# Altium PCB PCB1.PcbDoc (part 2 of 2)
Units mil, origin at the board's own origin, x right, y up, seen from the top; angles counter-clockwise.
Board outline 1637.83 x 850.42 mil, 4 copper layers (Top Layer, Signal Layer 1, Signal Layer 2, Bottom Layer), stack 30.634 mil thick; 87 components, 65 nets, 368 pads, 401 vias.
Unrouted connection lines stored in the file: 1.
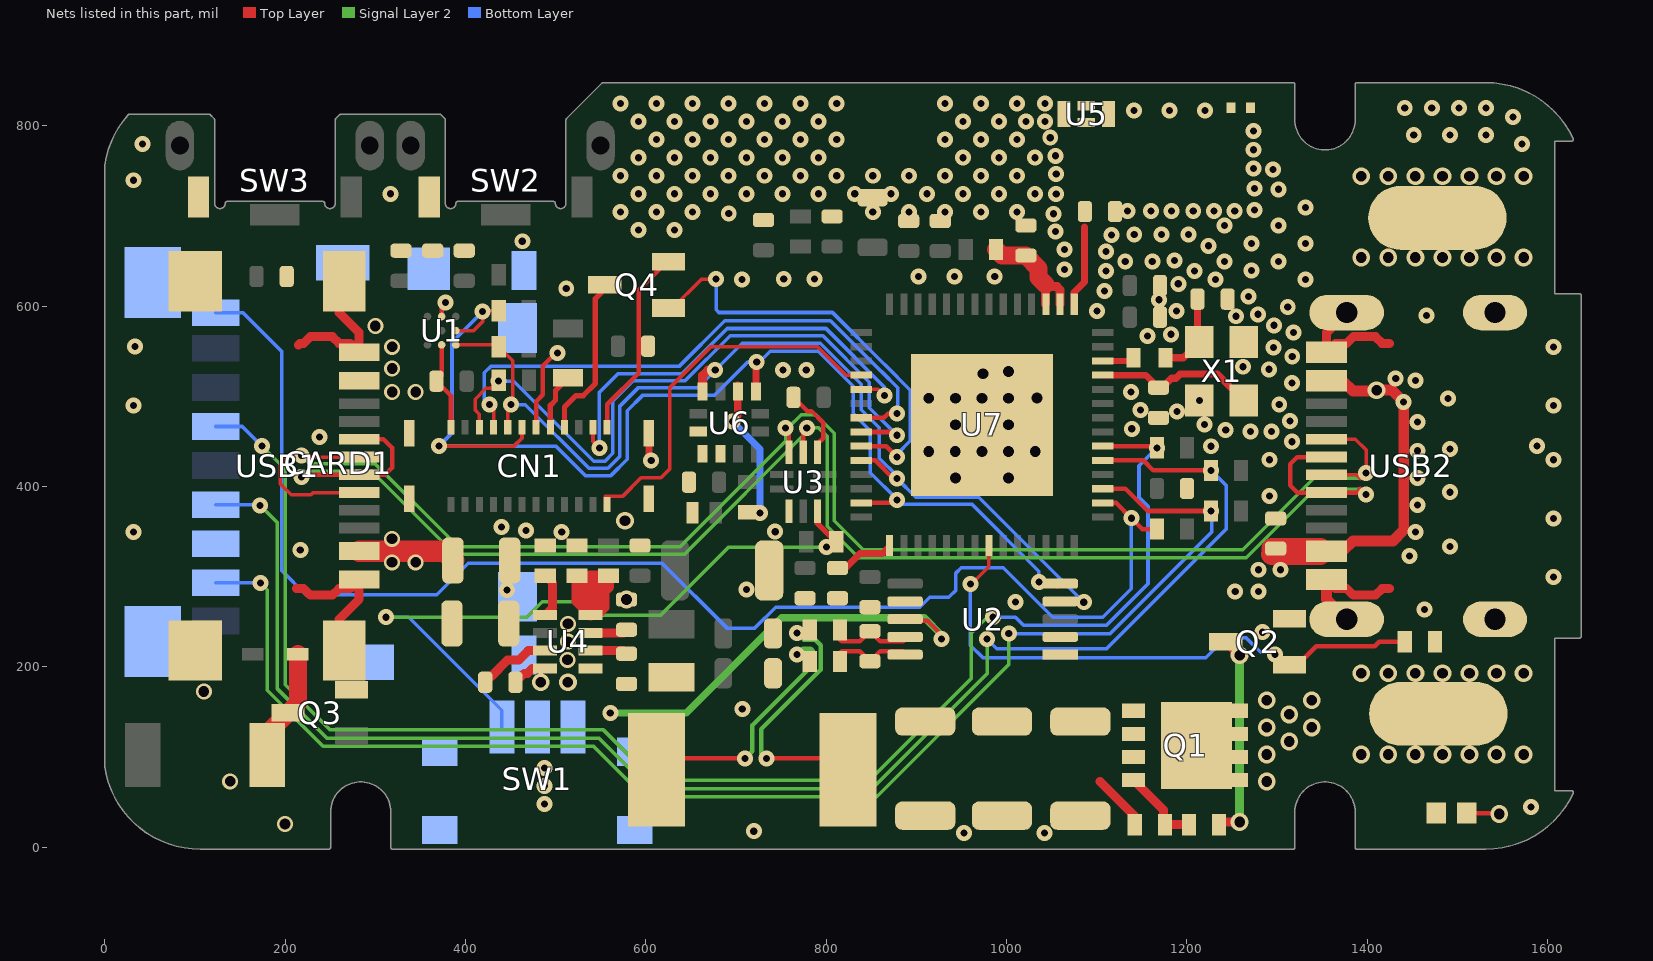
[diagram p4: the nets of this part, all layers, seen from the top]

## Via types
v1: diameter 17.72, hole 7.87, Top Layer to Bottom Layer, 324 vias
v2: diameter 19.68, hole 11.81, Top Layer to Bottom Layer, 43 vias
v3: diameter 17.72, hole 11.81, Top Layer to Bottom Layer, 16 vias
v4: diameter 22, hole 12, Top Layer to Bottom Layer, 15 vias
v5: diameter 19.68, hole 12.01, Top Layer to Bottom Layer, 2 vias
v6: diameter 17.72, hole 9.84, Top Layer to Bottom Layer, 1 vias

## Nets (pads, with @x,y where several pads share a name; then routed paths per layer and width w, separated by ;. In a path a pad name is that pad's centre, name@x,y a point inside that pad or via, vN(x,y) a via of type N, cw(c..) or ccw(c..) an arc to the next point about the centre after c; other vN are vias at no path point) (continued)
G13: CN1.12 U7.18 | length 428.2
  Top Layer w4: CN1.12@557.17,379.92 555,382.08 555,389 574.09,389 594.75,409.65 616.76,409.65 626.76,419.65 626.76,509.8 671.77,554.83 790.58,554.83 821.98,523.43 U7.18@838.74,523.43
G14: CN1.14 U7.19 | length 498
  Top Layer w3.94: CN1.14@541.42,465.74 541.42,450 v1(548.58,442.83)
  Top Layer w4: U7.19@838.74,507.68 857.73,507.68 v1(864.58,500.83)
  Bottom Layer w4: v1(548.58,442.83) 548.58,504.58 569.2,525.2 640.2,525.2 690.2,575.2 799.8,575.2 864.58,510.42 v1(864.58,500.83)
G15: CN1.21 U7.21 | length 648.6
  Top Layer w3.94: v1(426.58,490.83) 431.18,486.24 CN1.21@431.18,465.74
  Top Layer w5: U7.21@838.74,476.19 863.95,476.19 868.58,480.83 v1(878.58,480.83)
  Bottom Layer w3.94: v1(426.58,490.83) 421,496.41 421,526 428.17,533.17 636.9,533.17 687.73,584 804.78,584 861.78,527 862,527 879.41,509.59 879.41,481.65 v1(878.58,480.83)
G16: CN1.22 R18.2 U7.22 | length 742
  Top Layer w3.94: CN1.22@415.43,465.74 415.43,479.99 410.65,484.77 410.65,496.89 422.58,508.83 427.85,508.83 R18.2@436.85,517.83
  Top Layer w5: U7.22@838.74,460.44 874.97,460.44 v1(878.58,456.83)
  Bottom Layer w3.94: v1(436.58,516.83) 453.62,516.83 542.44,428 554.72,428 563.41,436.69 563.41,494.41 586.24,517.24 643.51,517.24 693.51,567.24 796.49,567.24 848,515.73 848,487.41 v1(878.58,456.83)
G17: Q4.1 U7.23 | length 473.9
  Top Layer w3.94: Q4.1@628.93,597.24 661.7,630 v1(678,630)
  Top Layer w5: U7.23@838.74,444.69 866.72,444.69 v1(878.58,432.83)
  Bottom Layer w3.94: v1(678,630) 678,596 681,593 807,593 865.06,534.94 865.29,534.94 893.41,506.81 893.41,450.69 878.58,435.86 v1(878.58,432.83)
G18: CN1.20 R19.2 U1.C3 U2.4 U6.4 U7.24 | length 1167.3
  Top Layer w3.94: R19.2@436.81,555.11 452.58,539.34 452.58,492.83 v1(450.58,490.83) 446.93,487.17 CN1.20@446.93,465.74
  Top Layer w4: U1.C3@389.33,557.08 434.84,557.08 R19.2@436.81,555.11
  Top Layer w5: U7.24@838.74,428.94 854.47,428.94 874.58,408.83 v1(878.58,408.83) ; U2.4@1059.65,272.51 1060.5,271.65 v1(1085.76,271.65)
  Top Layer w10: U6.4@663.05,505.28 663.05,523.05 669,529 v1(677,529)
  Bottom Layer w3.94: v1(450.58,490.83) 466.17,490.83 536.94,420.06 558.01,420.06 571.35,433.4 571.35,489.35 591.3,509.3 657.3,509.3 v1(677,529) 707,559 793.51,559 839,513.51 839,485.19 859,465.19 859,431.44 878.58,411.86 v1(878.58,408.83) 899.41,388 969.41,388 v1(1085.76,271.65)
G21: CN1.19 R20.2 U1.B3 U2.5 U6.1 U7.27 | length 1363.4
  Top Layer w3.94: v1(419,594) 419.99,594.99 R20.2@436.81,594.99
  Top Layer w4: v1(370.58,444.83) 453.83,444.83 462.68,453.68 CN1.19@462.68,465.74 ; U1.B3@389.33,572.82 408.82,572.82 419,583 v1(419,594)
  Top Layer w5: U7.27@838.74,381.7 875.46,381.7 v1(878.58,384.83) ; v1(1036,294) 1051.1,294 1056.27,288.83 U2.5@1059.65,292.2
  Top Layer w7.87: U6.1@722.11,505.28 v1@722.11,529.58
  Bottom Layer w3.94: v1(723,538) 723,535 738,550 791.28,550 830,511.28 830,481 849,462 849,415.44 878.58,385.85 v1(878.58,384.83) 883.35,380.06 961.94,380.06 1036,306 v1(1036,294)
  Bottom Layer w4: v1(419,594) 385,560 385,459.24 v1(370.58,444.83) 500.17,444.83 532.9,412.1 561.31,412.1 579.32,430.1 579.32,484.05 596.27,501 676,501 713,538 v1(723,538)
G39: CARD1.9 R17.1 U7.44 | length 1557
  Top Layer w5: U7.44@1106.45,381.7 1121.71,381.7 v1(1138.58,364.83) 1150.58,352.83 R17.1@1166.85,352.83
  Bottom Layer w3.94: CARD1.9@123.03,592.52 153.48,592.52 196,550 196,307 223,280 368,280 403,315 618,315 690,243 721,243 744,266 904,266 915,277 936,277 944,285 944,304 950,310 996.38,310 1051.38,255 1107,255 1138.58,286.58 v1(1138.58,364.83)
G40: CARD1.7 R15.2 U7.45 | length 1564.2
  Top Layer w5: U7.45@1106.45,397.45 1131.96,397.45 1156.58,372.83 v1(1226.85,372.83)
  Signal Layer 2 w3.94: v1(172.58,292.83) 180,285.41 180,174 242,112 542,112 598,56 856,56 1002.58,202.58 v1(1002.58,236.83)
  Bottom Layer w3.94: CARD1.7@123.03,293.31 172.1,293.31 v1(172.58,292.83) ; v1(1002.58,236.83) 1114.83,236.83 1227.94,349.94 1227.94,371.74 v1(1226.85,372.83)
G41: CARD1.5 R14.2 U7.47 | length 1709.9
  Top Layer w5: U7.47@1106.45,428.94 1151.84,428.94 1162.95,417.83 v1(1226.85,417.83)
  Signal Layer 2 w3.94: v1(172.24,378.94) 191,360.18 191,176 246,121 548,121 604.06,64.94 850.94,64.94 978.58,192.58 v1(978.58,230.83)
  Bottom Layer w3.94: CARD1.5@123.03,379.92 171.26,379.92 v1(172.24,378.94) ; v1@978.58,233.8 v1(978.58,230.83) 989.41,220 1111,220 1244,353 1244,400.68 v1(1226.85,417.83)
G42: CARD1.3 R13.2 U7.48 | length 1688.2
  Top Layer w5: U7.48@1106.45,444.69 1164.99,444.69 v1(1166.85,442.83)
  Signal Layer 2 w3.94: v1(174.21,444.88) 200,419.09 200,180 250,130 553,130 609,74 848,74 961,187 961,237.24 978.76,255 v1(985,255)
  Bottom Layer w3.94: CARD1.3@123.03,466.54 152.56,466.54 v1(174.21,444.88) ; v1(985,255) 1010,255 1019,246 1111,246 1157,292 1157,378 1147,388 1147,422.98 v1(1166.85,442.83)
G48: Q2.1 R22.2 U7.36 | length 639.5
  Top Layer w3.94: v1(960,292) 961.41,292 980.47,311.06 U7.36@980.47,334.46 ; v1(1297.76,213.65) 1309.17,202.24 Q2.1@1313.93,202.24
  Top Layer w5: Q2.1@1313.93,202.24 1322.99,202.24 1343.58,222.83 1408.58,222.83 1413.58,227.83 R22.2@1441.85,227.83
  Bottom Layer w3.94: v1(960,292) 960,224 974,210 1221,210 1243,232 1266,232 1282,216 1295.41,216 v1(1297.76,213.65)
GND: C1.1 C2.1 C3.1 C4.1 C5.2 C6.1 C7.2 C9.2 C11.2 C12.1 C13.1 C14.2 C15.1 C16.2 C17.1 C18.1 C19.1 C20.1 C21.2 C22.1 C23.2 C24.1 C25.1 C26.2 C27.1 C28.1 C29.1 C30.2 C31.1 C32.1 C33.1 C34.2 C35.2 C36.2 C38.1 C39.2 CARD1.6 CARD1.10 CARD1.11 CN1.13 CN1.18 CN1.24 CN1.25 CN1.26 CN1.27 CN1.28 D4.1 J2.1 Q2.2 Q3.2 Q4.2 R8.1 R9.1 R22.1 SW1.1 SW1.2 SW1.4 SW1.5 SW2.1 SW3.1 U1.C2 U2.1 U2.2 U2.7 U3.3 U3.8 U4.4 U5.4 U6.6 U6.7 U6.8 U7.57 U8.1 USB1.0 USB1.A1 USB1.A12 USB2.12 USB2.13 USB2.14 USB2.15 USB2.A1B12 USB2.B1A12 X1.2 X1.4 | length 1127.9
  Top Layer w5: U1.C2@373.58,557.08 373.58,522.56 C36.2@367.85,516.83 383.94,500.74 CN1.24@383.94,465.74 ; CN1.18@478.43,465.74 478.43,494.32 485.76,501.65 485.76,533.65 500.1,548 v1(502,548) ; CN1.13@557.17,465.74 557.17,491.06 592.41,526.31 592.41,618.31 622.52,648.42 Q4.2@628.93,648.42 ; C35.2@763.85,498.83 779.02,483.65 783.76,483.65 796.77,470.64 796.77,453.67 790.33,447.23 U3.3@790.33,438.08 ; U8.1@1510.41,37.82 1545.59,37.82 v2(1546.58,36.83)
  Top Layer w7.87: CN1.26@603.43,459.23 603.43,431.57 v1(606,429)
  Top Layer w10: 212.59,286.84 220.46,286.84 227.87,279.43 252.4,279.43 259.81,286.84 272.07,286.84 USB1.A12@282.07,296.85 282.07,274.99 259.83,252.75 ; 214.58,556.83 216.56,558.81 220.45,558.81 227.87,566.22 252.4,566.22 259.82,558.81 272.07,558.81 USB1.A1@282.07,548.81 282.07,570.67 259.83,592.91 ; C14.2@455.32,182.83 465.32,192.83 468.58,192.83 474.05,198.3 U4.4@488.38,198.3 ; USB2.A1B12@1355.1,296.85 1365.1,286.84 1377.36,286.84 1384.76,279.43 1409.3,279.43 1416.7,286.84 1424.57,286.84 ; USB2.13@1377.34,592.91 1355.1,570.67 USB2.B1A12@1355.1,548.82 1365.1,558.82 1377.36,558.82 1384.76,566.22 1409.3,566.22 1416.7,558.82 1424.57,558.82
  Top Layer w12: USB2.A1B12@1355.1,296.85 1355.1,274.99 USB2.12@1377.34,252.75
  other v1: 953.02,15.86 1041.98,15.86 719.76,17.65 1581.76,44.65 707,153 1284.18,238.36 1463.76,263.65 1010,272 446,285 711.76,285.65 1606.76,299.65 216.76,329.65 1491.76,333.65 31.76,349.65 506.76,349.65 743.55,349.84 467,351 440,355 1606.76,364.65 1291.76,389.65 1491.76,393.65 1291.76,429.65 1606.76,429.65 1491.76,441.65 1226.76,444.65 1588.58,444.83 1316.76,449.65 238,455 1270.58,460.83 1294,460.8 1243.19,462.83 1139,464 1219.7,468.77 1314.58,472.83 1189,483 1148.58,484.83 31.76,489.65 1606.76,489.65 1302.58,490.83 1213.98,495.35 1489.76,497.65 1138,505 1316.76,514.65 752,529 778,529 1291,530 1262.58,532.83 1317,544 1296,554 33.46,555.12 1606.76,554.65 1156.58,566.83 1182.58,568.83 1318.58,570.83 1296.58,578.83 1254.58,588.83 1465.76,589.65 1279,591 1100.58,594.83 1188.58,594.83 1312,599 1169.33,607.08 1268.58,610.83 1108.58,616.83 511.76,619.65 1190.58,624.83 706.76,629.65 753,630 787,630 1231.76,629.65 1331.76,629.65 902.58,632.83 942.58,632.83 987,633 1110.58,638.83 1208.58,638.83 1271.76,639.65 1064.58,640.83 1131.76,649.65 1161.76,649.65 1241.76,649.65 1301.76,649.65 1186.58,650.83 1110.58,660.83 1064.58,662.83 1224,667 1271.76,669.65 1331.76,669.65 463,672 1116.58,678.83 1141.76,679.65 1171.76,679.65 1201.76,679.65 1054.58,682.83 591.76,684.65 631.76,684.65 1241.76,689.65 1301.76,689.65 1052.19,702.49 692,703 571.76,704.65 611.76,704.65 651.76,704.65 851.76,704.65 891.76,704.65 931.76,704.65 971.76,704.65 1011.76,704.65 1134.19,705.49 1160.19,705.49 1183.19,705.49 1207.19,705.49 1230.19,705.49 1253.19,705.49 1275.19,706.49 1331.76,709.65 1055.19,724.49 316.76,724.65 591.76,724.65 631.76,724.65 671.76,724.65 711.76,724.65 751.76,724.65 791.76,724.65 831.76,724.65 871.76,724.65 911.76,724.65 951.76,724.65 991.76,724.65 1031.76,724.65 1275.19,730.49 1301.76,729.65 31.76,739.65 571.76,744.65 611.76,744.65 651.76,744.65 691.76,744.65 731.76,744.65 771.76,744.65 811.76,744.65 851.76,744.65 891.76,744.65 931.76,744.65 971.76,744.65 1011.76,744.65 1055.19,746.49 1274.19,752.49 1295.76,751.65 591.76,764.65 631.76,764.65 671.76,764.65 711.76,764.65 751.76,764.65 791.76,764.65 951.76,764.65 991.76,764.65 1031.76,764.65 1054.58,766.83 1274.19,773.49 41.76,779.65 1571.76,779.65 611.76,784.65 651.76,784.65 691.76,784.65 731.76,784.65 771.76,784.65 811.76,784.65 931.76,784.65 971.76,784.65 1011.76,784.65 1048.58,786.83 1451.76,789.65 1491.76,789.65 1531.76,789.65 1274.19,794.49 591.76,804.65 631.76,804.65 671.76,804.65 711.76,804.65 751.76,804.65 791.76,804.65 951.76,804.65 991.76,804.65 1021.76,804.65 1042.58,804.83 1561.76,809.65 1441.76,819.65 1471.76,819.65 1501.76,819.65 1531.76,819.65 571.76,824.65 611.76,824.65 651.76,824.65 691.76,824.65 731.76,824.65 771.76,824.65 811.76,824.65 931.76,824.65 971.76,824.65 1011.76,824.65 1042.58,824.83
  other v2: 483.58,182.83 513.58,182.83 974,525 1393.58,654.01 1423.58,654.01 1453.58,654.01 1483.58,654.01 1513.58,654.01 1543.58,654.01 1573.58,654.01 1393.58,744.01 1423.58,744.01 1453.58,744.01 1483.58,744.01 1513.58,744.01 1543.58,744.01 1573.58,744.01
  other v3: 199.76,25.65 139,73 109.76,172.65 513.19,207.77 513.66,227.95 513.66,247.62 318.58,554.83 300,578
  other v4: 943.34,409.34 1002.39,409.34 913.82,438.87 943.31,438.89 972.86,438.87 1002.36,438.89 1031.91,438.87 943.34,468.39 1002.39,468.39 913.85,497.89 943.34,497.91 972.86,497.91 1002.39,497.91 1034,498 1002.39,527.44
  other v5: 578.58,274.56 577,362
LEDA: CN1.17 R10.1 | length 62.8
  Top Layer w5.91: CN1.17@494.17,465.74 494.17,490.06 499.76,495.65 499.76,506.68 R10.1@513.58,520.51
LEDK: CN1.16 Q4.3 | length 181.8
  Top Layer w5.91: CN1.16@509.92,465.74 509.92,488.16 522.58,500.83 530.58,500.83 544,514.24 544,608.59 Q4.3@558.23,622.83
NetBUZZER1_2: BUZZER1.2 D1.2 Q3.3 | length 126.1
  Top Layer w20: BUZZER1.2@180,102 180,126 Q3.3@203,149 214,160 D1.2@214,214
NetC8_1: C8.1 R3.1 U2.9 | length 96.8
  Top Layer w5: R3.1@815.32,240.83 815.32,230.09 817.08,228.32 837.34,228.32 C8.1@848.58,239.56 859.82,228.32 885.75,228.32 887.52,230.09 U2.9@887.52,233.14
NetC8_2: C8.2 R2.1 U2.10 | length 94.8
  Top Layer w5: R2.1@815.32,205.83 815.32,215.57 817.08,217.34 837.34,217.34 C8.2@848.58,206.1 859.82,217.34 885.75,217.34 887.52,215.57 U2.10@887.52,213.45
NetC10_1: C10.1 L1.1 U4.5
NetC10_2: C10.2 U4.6 | length 41.2
  Top Layer w10: U4.6@538.79,217.99 575.16,217.99 C10.2@578.58,214.56
NetC19_2: C19.2 U4.7 | length 41.2
  Top Layer w10: U4.7@538.79,237.67 575.15,237.67 C19.2@578.58,241.1
NetC20_2: C20.2 U5.1
  other v1: 1141.39,817.11 1180.76,817.11 1220.13,817.11
NetC21_1: C21.1 U5.2 U5.5 U7.1 | length 90.3
  Top Layer w7.95: U7.1@1074.96,602.18 1074.96,615.21 1086.58,626.83 1086.58,687.65
NetC30_1: C30.1 L2.2 U7.2 U7.3 | length 133.2
  Top Layer w10: U7.3@1043.46,602.18 1043.46,623.95 1045.85,621.56 1055.85,621.56 1059.21,618.2 U7.2@1059.21,602.18
  Top Layer w20: L2.2@988.32,662.83 995.05,656.1 C30.1@1021.58,656.1 1035.76,641.91 1035.76,631.65 1043.46,623.95
NetC31_2: C31.2 L3.2 X1.3 | length 93.3
  Top Layer w8: L3.2@1176.3,542.83 1196.5,542.83 X1.3@1213.98,560.31 1211.85,562.43 C31.2@1211.85,607.83
NetC32_2: C32.2 U7.53 X1.1 | length 181
  Top Layer w7.09: U7.53@1106.45,523.43 1154.71,523.43 C32.2@1168.58,509.56
  Top Layer w8: C32.2@1168.58,509.56 1172.52,509.56 1182.96,520 1188,520 1192.83,524.83 1233.71,524.83 X1.1@1263.19,495.35
NetC38_2: C38.2 U7.29 | length 68.5
  Top Layer w7.87: C38.2@812.58,309.56 821.32,309.56 837.41,325.65 862.37,325.65 870.24,333.53 U7.29@870.24,334.46
NetJ1_1: J1.1 Q1.5 Q1.6 Q1.7 Q1.8 Q1.9 U8.2
  other v2: 1288.58,72.83 1288.58,102.83 1393.58,102.83 1423.58,102.83 1453.58,102.83 1483.58,102.83 1513.58,102.83 1543.58,102.83 1573.58,102.83 1313.58,117.19 1288.58,132.83 1338.58,132.83 1313.58,147.24 1288.58,162.83 1338.58,162.83 1393.58,192.83 1423.58,192.83 1453.58,192.83 1483.58,192.83 1513.58,192.83 1543.58,192.83 1573.58,192.83
NetL3_1: L3.1 U7.54 | length 35.9
  Top Layer w7.09: U7.54@1106.45,539.18 1137.22,539.18 L3.1@1140.87,542.83
NetQ1_4: Q1.4 R5.1 R6.2 | length 89.6
  Top Layer w10: Q1.4@1141,74.44 1174,41.44 1174,25 R6.2@1200.54,25
NetQ2_3: Q2.3 R6.1 | length 235.6
  Top Layer w10: R6.1@1235.78,24.67 1238.93,27.83 v2(1258.58,27.83) v2@1255.09,24.33 ; Q2.3@1243.23,227.83 1258.23,212.83 v2(1258.58,212.83)
  Signal Layer 2 w10: v2(1258.58,27.83) v2(1258.58,212.83)
NetR4_1: R4.1 SW1.3 U3.10 | length 778.9
  Top Layer w3.94: v1(800.58,332.83) 805.32,332.83 R4.1@811.32,338.83
  Top Layer w6.02: U3.10@790.33,372.54 790.33,359.08 810.58,338.83 R4.1@811.32,338.83
  Signal Layer 2 w3.94: v1(312,255) 468,255 485,272 536,272 551,257 616,257 691.83,332.83 v1(800.58,332.83)
  Bottom Layer w3.94: v1(312,255) 337,255 440.36,151.64 SW1.3@440.36,133.18
NetR7_1: R7.1 R9.2 U4.8 | length 249.8
  Top Layer w3.94: R9.2@523.58,301.1 R9.2@530.05,301.1
  Top Layer w11.81: R9.2@523.58,301.1 523.58,272.56 U4.8@538.79,257.36 538.79,275.36 ; 530.05,283.1 530.05,301.1 R7.1@558.58,301.1 558.58,288.58 554,284 ; 532,270 532,288 ; 539,282 539,300 ; 548,280 R7.1@548,298 ; 554,284 554,266 547,259 547,277 554,284
NetR8_2: R8.2 U4.1 | length 50.5
  Top Layer w10: U4.1@488.38,257.36 496.58,265.56 496.58,293.1 R8.2@488.58,301.1
NetR16_1: R16.1 U6.2 | length 186
  Top Layer w7.87: v1@696,470.38 v1(696,472) v1@702,478 ; U6.2@702,512.6 v1@702,478 ; U6.2@702.42,505.28 702.42,478.42 v1@702,478
  Bottom Layer w7.87: v1(696,472) 726.58,441.42 v1(726.58,370.83)
USB_N: U3.4 USB1.A7 USB1.B7 USB2.A7 USB2.B7 | length 1784.6
  Top Layer w5: v1(218.22,410.47) 220.74,412.99 USB1.A7@282.07,412.99 310.74,412.99 318.58,420.83 318.58,442.83 309.05,452.36 USB1.B7@282.07,452.36 ; U3.4@774.58,438.08 774.58,460.93 v1(778.56,464.91) ; USB2.A7@1355.1,432.67 1322.42,432.67 1314.58,424.83 1314.58,401.3 1322.58,393.3 USB2.B7@1355.1,393.3 1388.23,393.3 1392.58,397.65 v1(1398.94,391.29)
  Signal Layer 2 w3.94: v1(218.22,410.47) 224.76,417 296,417 388,325 643,325 v1@778.56,460.56 ; v1(778.56,464.91) 791.87,464.91 801.06,455.71 801.06,355.94 836,321 1266,321 1342,397 v1@1393.23,397
  Signal Layer 2 w5: v1@1393.23,397 v1(1398.94,391.29)
USB_P: U3.5 USB1.A6 USB1.B6 USB2.A6 USB2.B6 | length 1804.7
  Top Layer w3.94: USB1.B6@282.07,393.3 231.05,393.3 228.58,390.83 206.58,390.83 194.58,402.83 194.58,424.83 203.93,434.17 v1(218.22,434.17) 219.73,432.67 USB1.A6@282.07,432.67 ; v1(755,465) 758.83,461.17 U3.5@758.83,438.08 ; USB2.A6@1355.1,412.99 1388.23,412.99 1392.58,408.64 v1(1398.94,414.99) 1398.94,440.47 1387.05,452.36 USB2.B6@1355.1,452.36
  Signal Layer 2 w3.94: v1(218.22,434.17) 227.4,425 300,425 392,333 638,333 755,450 v1(755,465) 757.68,465 772.42,479.74 788.26,479.74 809,459 809,362 841,330 1262,330 1341,409 1392.95,409 v1(1398.94,414.99)
VBUS: C12.2 C13.2 C14.1 R1.1 R2.2 U1.A2 U2.8 U4.3 USB1.A4 USB1.A9 | length 989.7
  Top Layer w5: U1.A2@373.58,588.57 373.58,599.82 377.76,604 v1(378,604) ; R1.1@613.86,97.95 614.38,98.47 v1(710.22,98.47) ; v1(767.76,213.65) 774.02,213.65 R2.2@781.85,205.83 ; U2.8@887.52,252.83 889.52,250.83 912.58,250.83 928,235.41 v1(928,231)
  Top Layer w10: 436.45,196.95 430.08,190.59 430.08,191.06 ; U4.3@488.38,217.99 469.62,217.99 459.47,207.83 446.85,207.83 430.08,191.06 ; 430.08,191.06 C14.1@421.85,182.83 430.08,191.06
  Top Layer w23.62: USB1.A9@282.07,328.34 376.58,328.34 C12.2@387.09,317.83
  Signal Layer 2 w5: v1(710.22,98.47) 718,106.24 718,135 785,202 785,218 783,220 774.1,220 v1(767.76,213.65)
  Signal Layer 2 w7.87: v1(560.58,148.83) 644.83,148.83 750.45,254.45 908.96,254.45 928,235.41 v1(928,231)
  other v1: 487.76,47.65 487.76,67.65 487.76,87.65
  other v3: 318.58,315.85 344.68,315.85 318.58,341.95 318.58,504.83 344.68,504.83 318.58,530.93
VBUS_OUT: C1.2 C2.2 C3.2 C4.2 Q1.1 Q1.2 Q1.3 R1.2 R3.2 R5.2 USB2.A4B9 USB2.B4A9 | length 804.2
  Top Layer w5: v1(733.93,98.47) 825.93,98.47 R1.2@826.46,97.95 ; v1(767.76,237.65) 778.68,237.65 R3.2@781.85,240.83
  Top Layer w10: 1103.58,72.83 1142.31,34.1 R5.2@1142.31,24.67
  Top Layer w12: USB2.A4B9@1355.1,328.34 1373.04,328.34 1384.35,339.65 1428.58,339.65 1440.58,351.65 v1(1440.58,493.8) 1427.53,506.85 v2(1410.56,506.85) 1409.71,506 1384.35,506 1373.04,517.32 USB2.B4A9@1355.1,517.32
  Top Layer w23.62: C4.2@1294.24,325 USB2.A4B9@1348,325 ; C4.2@1294.47,331.26 USB2.A4B9@1348.23,331.26 ; C4.2@1298.58,331.1 C4.2@1301.34,328.34
  Signal Layer 2 w5: v1(733.93,98.47) 728,104.4 728,131 794,197 794,224 788,230 775.41,230 v1(767.76,237.65)
  other v1: 1253.76,283.65 1279.76,283.65 1279.76,307.65 1303.76,307.65 1447.07,322.99 1453.76,349.65 1455.76,379.65 1455.76,409.65 1455.76,439.65 1455.76,471.65 1453.76,517.65 1431.76,519.65
pads on no net: CARD1.1 CARD1.2 CARD1.8 SW2.3 SW2.4 SW3.3 SW3.4 U2.3 U3.6 U3.7 U4.2 U6.3 U6.5 U6.11 U6.12 U7.28 U7.30 U7.31 U7.32 U7.33 U7.34 U7.35 U7.49 U7.50 U7.51 U7.52 USB1.A8 USB1.B8 USB2.A8 USB2.B8
copper on no net:
  other v1: 236.76,499.65

## Polygon pours and split planes (outlines as drawn)
GND on Top Layer "Top Layer-GND" (solid, remove dead copper, pour order 29): 1591,845.16 1632.1,804.07 1632.1,48.55 1579.68,-3.87 53.19,-3.87 -18.85,68.16 -18.85,812.79 13.52,845.16
+3V3 on Top Layer "Top Layer-+3V3" (solid, remove dead copper, pour order 14): 598.58,307.24 658.17,366.83 691.58,366.83 698.58,359.83 698.58,186.48 688.59,176.48 669.93,176.48 663.58,182.83 663.58,222.83 658.58,227.83 603.55,227.83 598.58,232.79
NetC10_1 on Top Layer "Top Layer-$1N6028" (solid, remove dead copper, pour order 16): 528.58,202.83 628.58,202.83 653.58,177.83 653.58,170 531.41,170 528.58,172.83
NetJ1_1 on Top Layer "Top Layer-$1N9298" (solid, remove dead copper, pour order 20): 1228.58,182.83 1328.58,182.83 1353.58,207.83 1485.58,207.83 1493.63,199.78 1493.63,37.83 1468.64,12.83 1367.54,12.83 1323.07,57.3 1244.11,57.3 1228.58,72.83
VBUS_OUT on Top Layer "Top Layer-VBUS_OUT" (solid, remove dead copper, pour order 22): 880.58,184.83 1065.58,184.83 1093.58,212.83 1093.58,302.83 1118.58,327.83 1238.58,327.83 1253.58,342.83 1323.58,342.83 1328.58,337.83 1328.58,292.83 1313.58,277.83 1297.1,277.83 1267.1,247.83 1223.58,247.83 1213.58,237.83 1213.58,212.58 1163.58,162.58 1163.58,92.83 1158.58,87.83 1125.83,87.83 1097.64,59.64 870.4,59.64 853.58,42.83 838.58,42.83 823.58,57.83 823.58,127.83
VBUS on Top Layer "Top Layer-VBUS" (solid, remove dead copper, pour order 24): 298.58,335.83 315.88,353.12 334.81,353.12 344,343.93 422.76,343.93 427.23,339.47 427.23,175.15 437.05,165.33 581.09,165.33 608.58,137.83 608.58,36.12 580.29,7.83 333.58,7.83 328.58,12.83 328.58,58.14 306.22,80.51 306.22,211.34 326.87,231.99 326.87,294.54 298.58,322.83
VBUS_OUT on Top Layer "Top Layer-VBUS_OUT 1" (solid, remove dead copper, pour order 28): 1357.33,528.86 1450.07,528.86 cw(c1450.07,509.18) 1469.76,509.18 1469.76,329.08 cw(c1450.07,329.08) 1450.07,309.39 1357.33,309.39 cw(c1357.33,329.08) 1337.65,329.08 1337.65,509.18 cw(c1357.33,509.18)
GND on Signal Layer 1 "Top Layer-GND" (solid, remove dead copper, pour order 30): 1609.92,851.4 1651.02,810.3 1651.02,54.78 1598.6,2.36 72.11,2.36 0.08,74.4 0.08,819.02 32.45,851.4
GND on Signal Layer 2 "Top Layer-GND" (solid, remove dead copper, pour order 31): 1601.46,847.77 1642.56,806.67 1642.56,51.15 1590.14,-1.27 63.65,-1.27 -8.39,70.77 -8.39,815.4 23.98,847.77
VBUS_OUT on Bottom Layer "Bottom Layer-No Net 1" (solid, remove dead copper, pour order 26): 1472.11,309 1341,309 1303,273 1245.49,273 1242,276.49 1242,316.89 1338,412.89 1338,534.2 1453.31,534.2 1456.31,531.2 1474.31,513.2 1474.31,433.2 1474.31,311.2
GND on Bottom Layer "Top Layer-GND" (solid, remove dead copper, pour order 32): 1574,865 1641.64,797.36 1641.64,41.84 1589.22,-10.58 62.73,-10.58 -9.31,61.46 -9.31,806.09 49.61,865
VBUS on Bottom Layer "Bottom Layer-No Net 1" (solid, remove dead copper, pour order 27): 309.31,540.2 334.8,540.2 342,533 356.8,518.2 356.8,499.81 356.8,497.8 343,484 334,475 334,408 334,363 350,347 362,335 362,297 292,297 289,300 256.16,332.84 256.16,505.16 291,540

## Keep-outs
Keep-Out Layer:
  lines w3.94: 1626.76,60.49 cw(c1531.18,105.06) 1531.18,-0.4 1388.78,-0.4 1388.78,38.9 ccw(c1353.35,38.9) 1317.91,38.9 1317.91,-0.4 319.25,-0.4 319.25,38.9 ccw(c283.82,38.9) 248.39,38.9 248.39,-0.4 105.98,-0.4 cw(c105.98,105.06) 1.65,89.69 1.65,755.96 cw(c105.78,740.63) 27.46,810.94 115.51,810.94 119.76,806.69 119.76,714.17 ccw(c127.64,714.17) 135.51,714.17 241.81,714.17 ccw(c249.69,714.17) 257.56,714.17 257.56,806.69 261.81,810.94 371.42,810.94 375.67,806.69 375.67,714.17 ccw(c383.54,714.17) 391.42,714.17 497.72,714.17 ccw(c505.59,714.17) 513.47,714.17 513.47,806.69 552.84,846.06 1317.91,846.06 1317.91,806.76 ccw(c1353.35,806.76) 1388.78,806.76 1388.78,846.06 1531.18,846.06 cw(c1531.18,740.6) 1626.76,785.17 ; 1626.79,60.62 1605.98,60.62 ; 1626.79,785.03 1605.98,785.03 1605.98,611.8 1635.51,611.8 1635.51,233.85 1605.98,233.85 ; 1605.98,60.62 1605.98,233.85 ; 1605.98,60.62 1605.98,233.85 ; 403.22,62.59 cw(c420.94,62.59) 438.66,62.59 cw(c420.94,62.59) 403.22,62.59 ; 521.33,62.59 cw(c539.05,62.59) 556.77,62.59 cw(c539.05,62.59) 521.33,62.59

## Other copper
Top Layer:
  region net NetC20_2: 1253.59,771.84 1253.59,826.95 1107.92,826.95 1107.92,798.29 1120.32,798.29 1120.32,807.27 1241.78,807.27 1241.78,771.84 1253.59,771.84
  region net VBUS: 301.66,523.93 315.56,537.83 332.58,537.83 353.58,516.83 353.58,502.83 348.58,497.83 313.58,497.83 301.66,509.75 301.66,523.93
  region net NetC21_1: 1076.43,686.62 1100.05,686.62 1100.05,826.85 1076.43,826.85 1076.43,686.62
  pour cut-out: 370.58,452.89 572.55,452.89 572.55,478.31 370.58,478.31 370.58,452.89
  pour cut-out: 362.12,545.27 391.93,545.27 391.93,572.83 362.12,572.83 362.12,545.27
  pour cut-out: 1384.18,491.44 1403.78,491.44 cw(c1403.78,483.57) 1411.66,483.57 1411.66,358.87 cw(c1403.78,358.87) 1403.78,351 1384.22,351 cw(c1384.18,358.87) 1376.3,358.87 1376.3,483.57 cw(c1384.18,483.57)
Bottom Layer:
  pour cut-out: 1380,421.5 1385.57,428 1406,428 1413,421 1413,354 1412,353 1410.5,351 1408,351 1386,351 1380,357
  pour cut-out: 1376,484 1388,496 1407,496 1417,486 1417,470 1411,464 1409,464 1407,462 1385,462 1376,471

## Silkscreen, mask and mechanical layers (free items; w line width, h text height)
Top Overlay:
  circle w10: c1353.35,38.9 r68.9
  circle w10: c1353.35,806.76 r68.9
  circle w7.87: c704.87,744.4 r14.14
  circle w10: c283.82,38.9 r68.9
  lines w3.94: -20,88.18 ccw(c98.11,96.06) 105.98,-22.05 1531.18,-22.05 ccw(c1539.06,96.06) 1657.17,88.18 1657.17,757.47 ccw(c1539.06,749.6) 1531.18,867.71 105.98,867.71 ccw(c98.11,749.6) -20,757.47 -20,88.18 ; 301.26,353.93 301.26,491.73 639.84,491.73 639.84,353.93 301.26,353.93
  lines w5.91: 644.87,744.4 704.87,744.4 704.87,783
  text "Y" at 683,790 h78.74
  text "X" at 639,785 h78.74 r180
  text "G0" at 15,686 h47.24
  text "EN" at 560.77,684.65 h47.24
Top Solder:
  lines w11.81: 310.62,152.52 316.19,158.09 ; 311.01,110.87 316.58,116.43 ; 312.23,196.17 316.41,200.35 ; 315.43,178.48 326.57,167.35 ; 315.82,136.83 326.95,125.69 ; 316.21,95.17 327.34,84.04 ; 324.97,214.44 327.76,211.65 ; 327.97,315.55 339.11,326.69 ; 328.23,188.17 339.37,199.31 ; 328.62,146.52 339.76,157.65 ; 329.01,104.87 340.14,116 ; 331.79,66 340.14,74.35 ; 333.37,277.31 338.6,282.62 ; 333.76,235.65 338.98,240.96 ; 340.27,303.44 351.41,292.31 ; 340.66,261.79 351.79,250.65 ; 341.05,220.14 352.18,209 ; 341.43,178.48 352.57,167.35 ; 341.82,53.52 352.95,42.39 ; 341.82,136.83 352.95,125.69 ; 342.21,95.17 353.34,84.04 ; 353.46,271.48 364.6,282.62 ; 353.85,229.83 364.98,240.96 ; 353.97,315.55 365.11,326.69 ; 354.23,188.17 365.37,199.31 ; 354.62,146.52 365.76,157.65 ; 355.01,21.56 366.14,32.69 ; 355.01,63.21 366.14,74.35 ; 355.01,104.87 366.14,116 ; 367.05,220.14 378.18,209 ; 367.43,178.48 378.57,167.35 ; 367.82,53.52 378.95,42.39 ; 367.82,136.83 378.95,125.69 ; 368.21,95.17 379.34,84.04 ; 380.23,188.17 391.37,199.31 ; 380.62,146.52 391.76,157.65 ; 381.01,21.56 392.14,32.69 ; 381.01,63.21 392.14,74.35 ; 381.01,104.87 392.14,116 ; 393.43,178.48 404.57,167.35 ; 393.82,136.83 404.95,125.69 ; 394.21,95.17 402.56,86.82 ; 402.97,212.44 405.76,209.65 ; 406.23,188.17 417.37,199.31 ; 406.62,146.52 417.76,157.65 ; 407.01,21.56 418.14,32.69 ; 407.01,104.87 418.14,116 ; 409.37,317.31 416.21,324.27 ; 409.59,234.56 416.43,241.52 ; 409.76,275.65 416.6,282.62 ; 418.27,303.44 421.61,300.1 ; 418.66,261.79 421.44,259.01 ; 419.05,220.14 421.83,217.35 ; 419.82,136.83 430.95,125.69 ; 432.62,146.52 443.76,157.65 ; 433.01,21.56 444.14,32.69 ; 433.01,104.87 444.14,116 ; 445.82,136.83 456.95,125.69 ; 446.21,95.17 457.34,84.04 ; 450.21,49.52 457.17,42.56 ; 458.62,146.52 469.76,157.65 ; 459.01,21.56 470.14,32.69 ; 459.01,63.21 470.14,74.35 ; 459.01,104.87 470.14,116 ; 471.82,136.83 482.95,125.69 ; 472.21,53.52 483.34,42.39 ; 472.21,95.17 483.34,84.04 ; 484.62,146.52 495.76,157.65 ; 485.01,21.56 496.14,32.69 ; 485.01,63.21 496.14,74.35 ; 485.01,104.87 496.14,116 ; 497.82,136.83 508.95,125.69 ; 498.21,53.52 509.34,42.39 ; 498.21,95.17 509.34,84.04 ; 510.62,146.52 521.76,157.65 ; 511.01,21.56 522.14,32.69 ; 511.01,104.87 522.14,116 ; 523.82,136.83 534.95,125.69 ; 536.62,146.52 547.76,157.65 ; 537.01,21.56 548.14,32.69 ; 537.01,104.87 548.14,116 ; 549.82,136.83 560.95,125.69 ; 563.01,21.56 574.14,32.69 ; 896.62,166.52 907.76,177.65 ; 922.62,166.52 933.76,177.65 ; 948.62,166.52 959.76,177.65 ; 974.62,166.52 985.76,177.65 ; 1000.62,166.52 1011.76,177.65 ; 1026.62,166.52 1037.76,177.65 ; 1052.62,166.52 1063.76,177.65 ; 1078.62,166.52 1089.76,177.65 ; 1090.62,200.13 1101.76,189 ; 1100.19,231.22 1103.53,227.88 ; 1101.52,270.86 1104.86,267.52 ; 1104.62,166.52 1115.76,177.65 ; 1104.62,208.52 1115.76,219.65 ; 1104.62,247.18 1115.76,258.31 ; 1104.62,285.84 1115.76,296.97 ; 1116.62,200.13 1127.76,189 ; 1116.62,277.45 1127.76,266.31 ; 1116.62,316.11 1127.76,304.97 ; 1122.19,233.22 1116.62,238.79 1127.76,227.65 ; 1130.62,208.52 1141.76,219.65 ; 1130.62,247.18 1141.76,258.31 ; 1130.62,285.84 1141.76,296.97 ; 1133.4,169.3 1141.76,177.65 ; 1142.62,200.13 1153.76,189 ; 1142.62,238.79 1153.76,227.65 ; 1142.62,277.45 1153.76,266.31 ; 1142.62,316.11 1153.76,304.97 ; 1156.62,208.52 1167.76,219.65 ; 1156.62,247.18 1167.76,258.31 ; 1156.62,285.84 1167.76,296.97 ; 1159.4,169.3 1167.76,177.65 ; 1168.62,200.13 1179.76,189 ; 1168.62,238.79 1179.76,227.65 ; 1168.62,277.45 1179.76,266.31 ; 1168.62,316.11 1179.76,304.97 ; 1182.62,208.52 1193.76,219.65 ; 1182.62,247.18 1193.76,258.31 ; 1182.62,285.84 1193.76,296.97 ; 1194.62,238.79 1205.76,227.65 ; 1194.62,277.45 1205.76,266.31 ; 1194.62,316.11 1205.76,304.97 ; 1208.62,247.18 1219.76,258.31 ; 1208.62,285.84 1219.76,296.97 ; 1220.62,277.45 1231.76,266.31 ; 1220.62,316.11 1231.76,304.97 ; 1234.62,285.84 1245.76,296.97 ; 1246.62,316.11 1257.76,304.97 ; 1260.62,324.49 1271.76,335.63 ; 1272.62,316.11 1283.76,304.97

## Dimensions
1.65,755.96 to 1635.51,611.8 on Top Overlay
105.98,-0.4 to 27.46,810.94 on Top Overlay

## Text inside footprints (layer, text, board x,y; h text height)
C1: Top Overlay "C" at 1103,72.17 h39.37 r90
C2: Top Overlay "C" at 1016,72.17 h39.37 r90
C3: Top Overlay "C" at 931,72.17 h39.37 r90
C15: Top Overlay "C" at 727.18,257.98 h39.37 r180
C17: Top Overlay "C" at 727.21,213.81 h39.37 r180
C18: Top Overlay "C" at 699.58,327.83 h39.37 r180
C33: Top Overlay "C" at 830.6,706.45 h39.37 r270
R10: Top Overlay "R" at 534.84,535.33 h39.37 r90